# Altium PCB BuckTest.PcbDoc
Units mil, origin at the board's own origin, x right, y up, seen from the top; angles counter-clockwise.
Board outline 2275 x 2100 mil, 2 copper layers (Top Layer, Bottom Layer); 27 components, 21 nets, 91 pads, 13 vias.
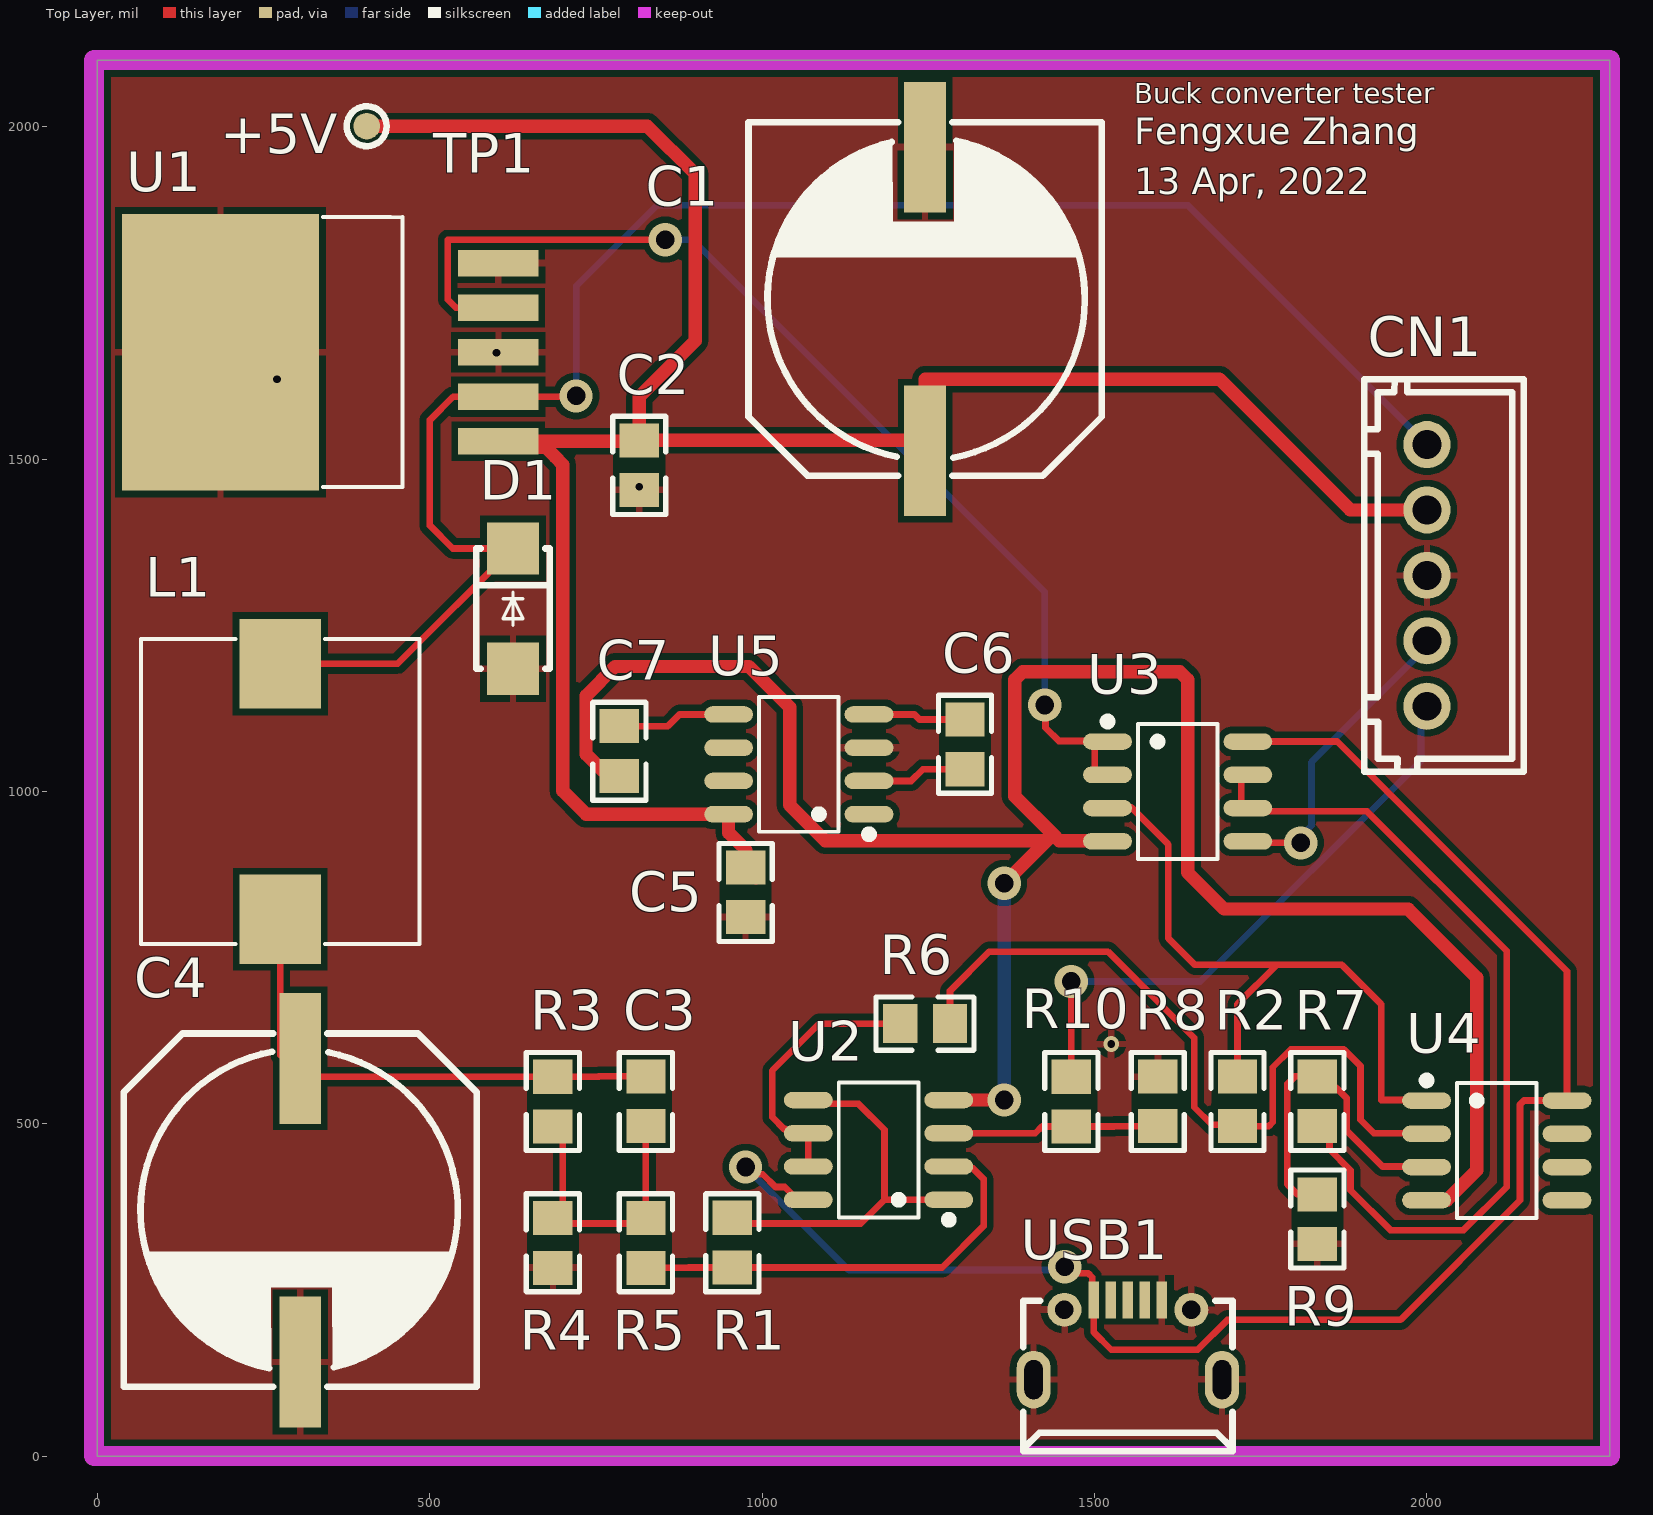
[diagram p0: Top Layer view]
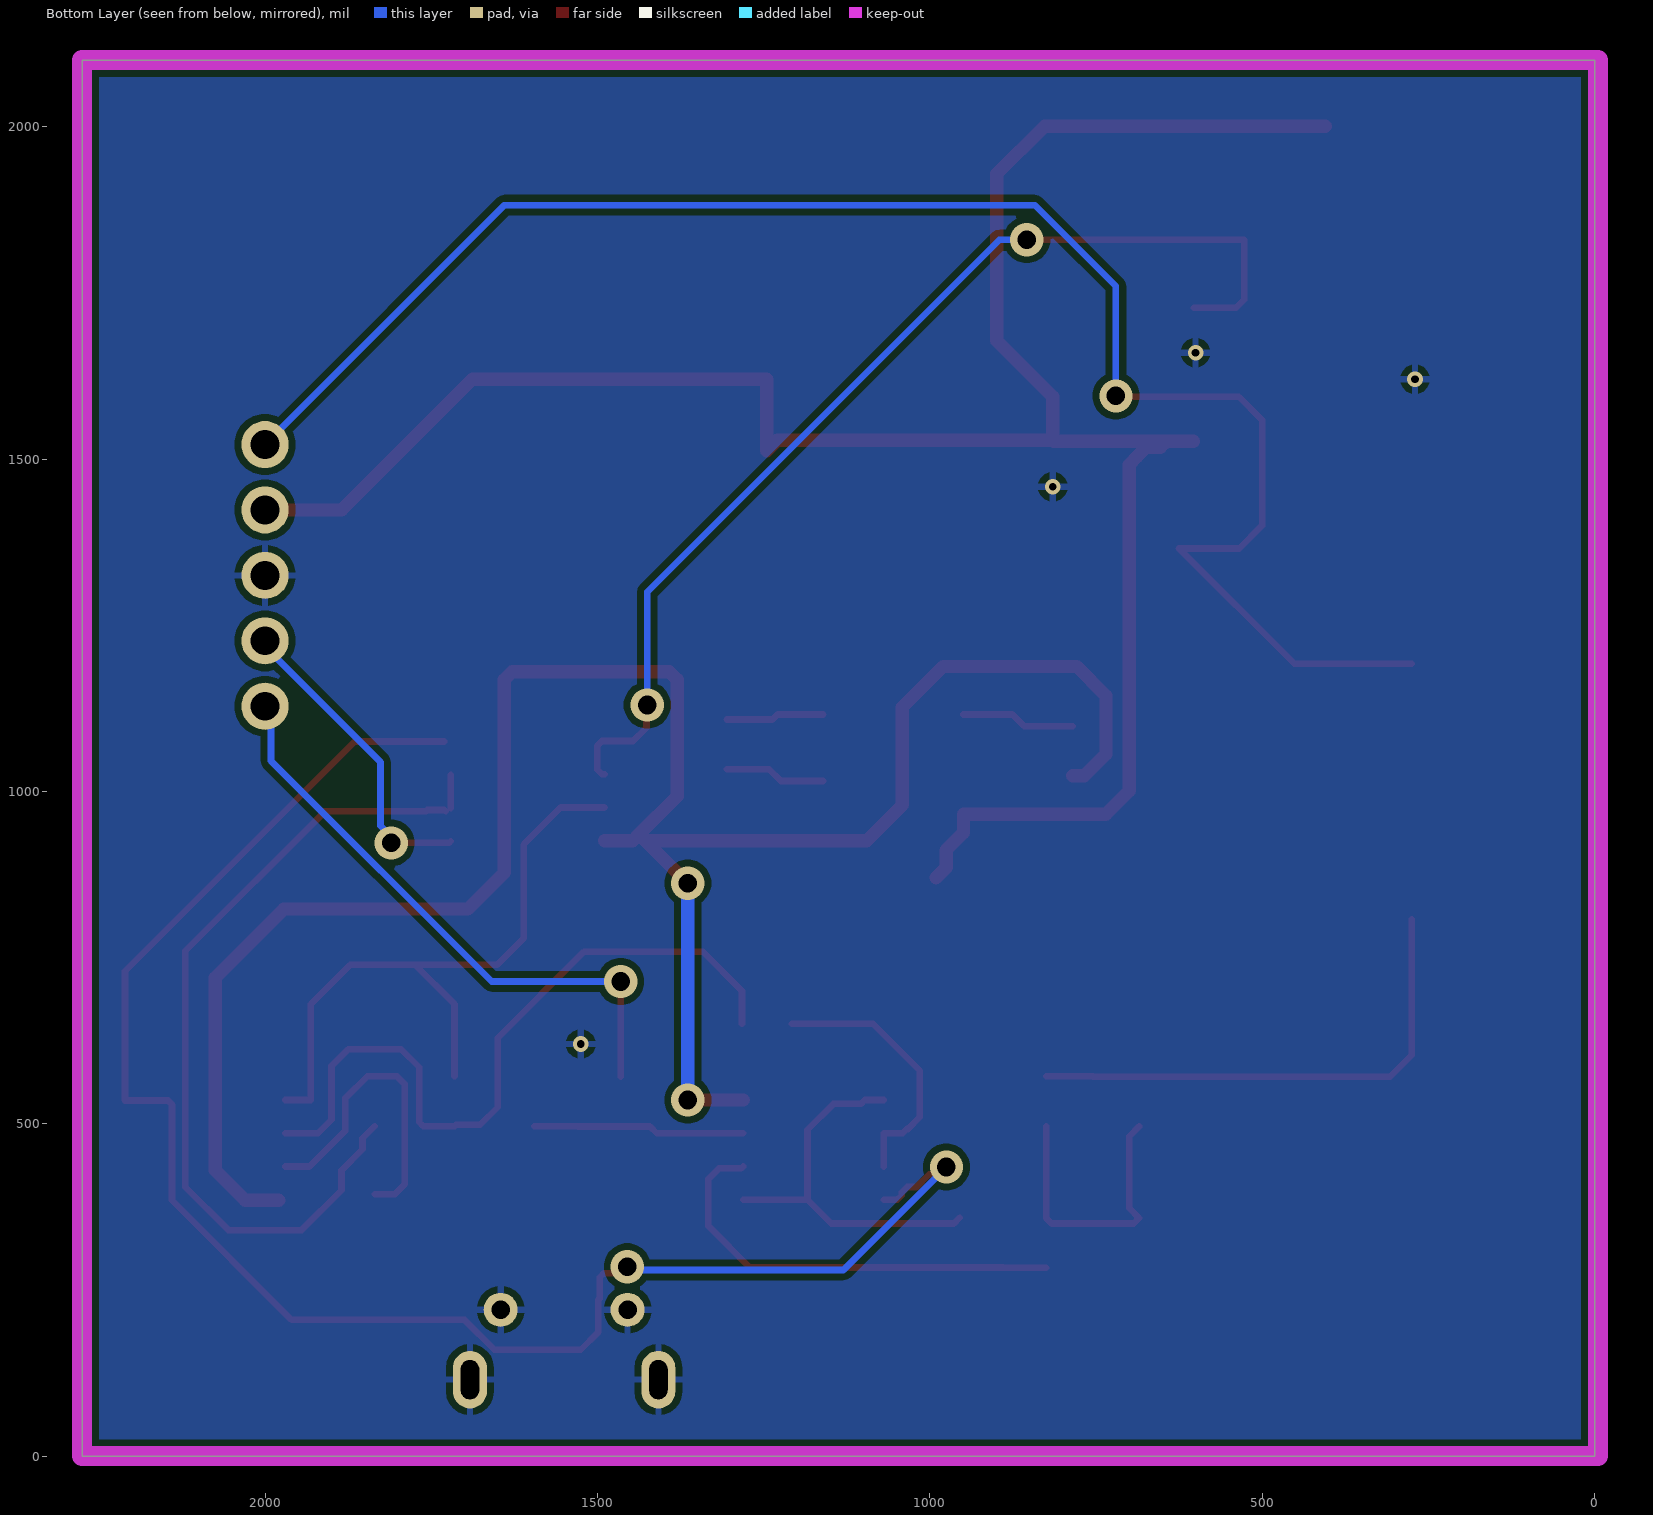
[diagram p1: Bottom Layer view, seen from below]
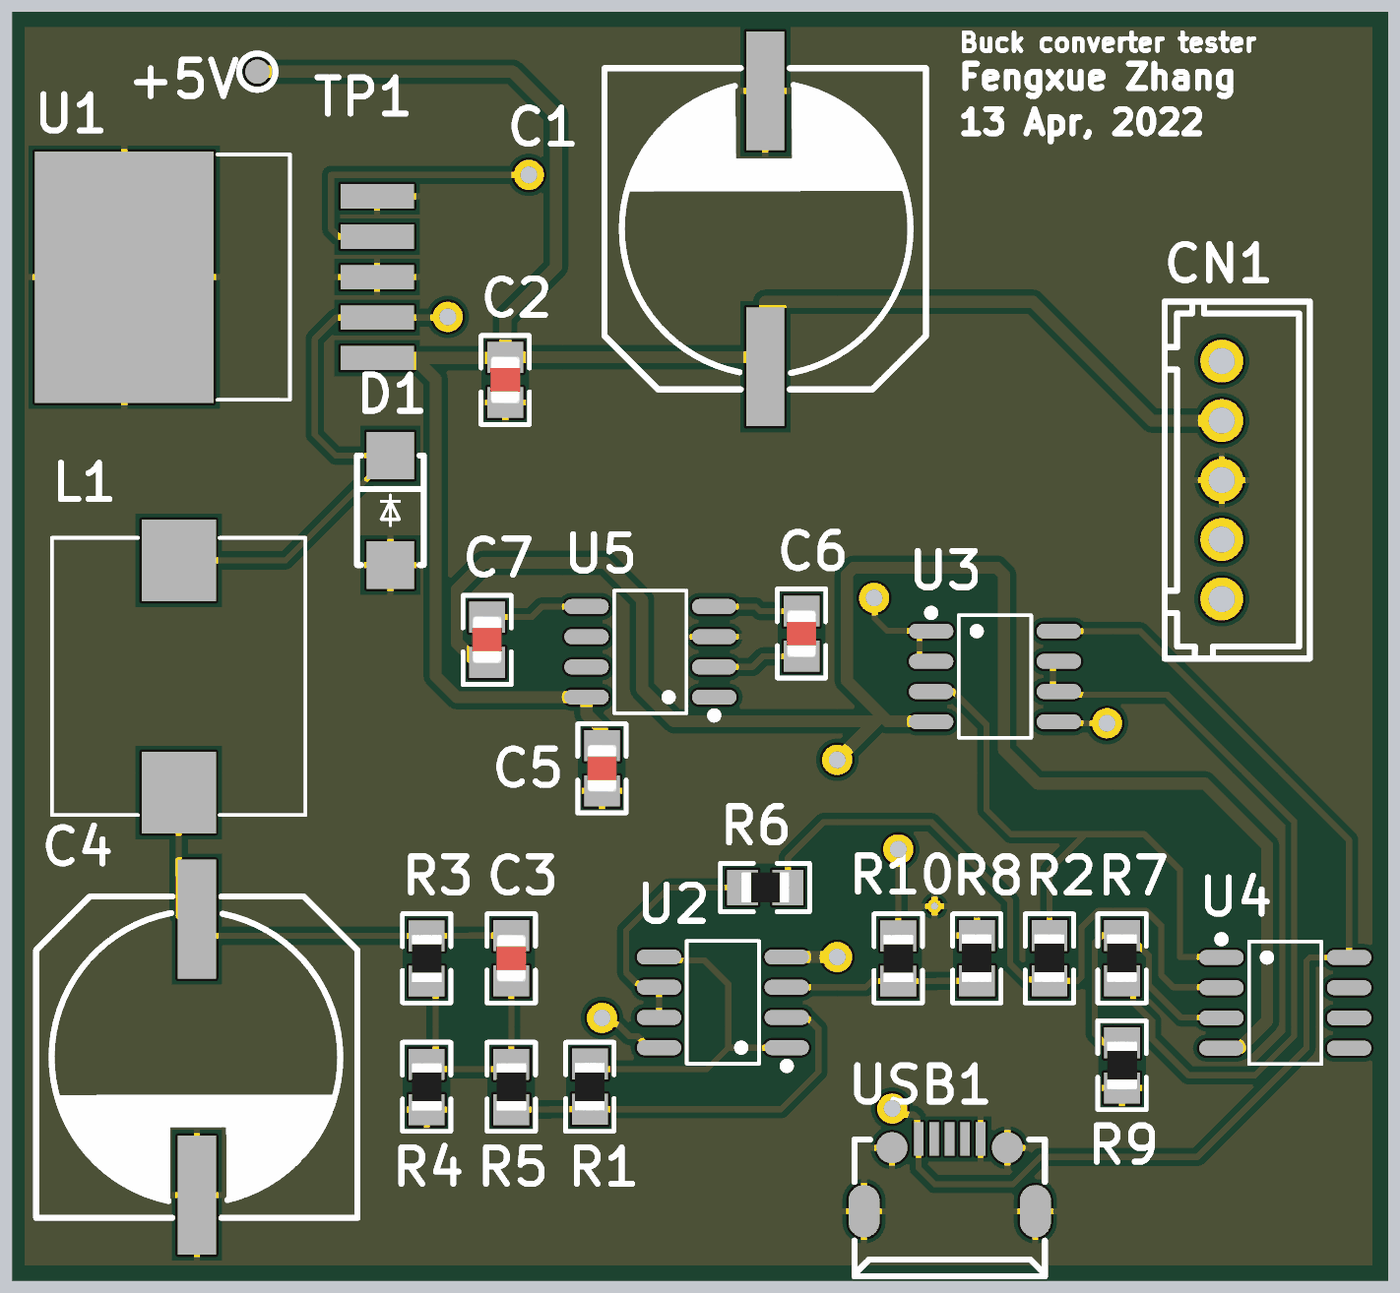
[diagram p2: 3D render of the assembled board from above, using the file's embedded part models]

## Layer stack, top to bottom
Top Solder: solder mask 0.4, Solder Resist, Dk 3.5
Top Layer: signal copper 1.4
Dielectric 1: dielectric 12.6, FR-4, Dk 4.8
Bottom Layer: signal copper 1.4
Bottom Solder: solder mask 0.4, Solder Resist, Dk 3.5

## Board outline
0,0 0,25 0,2100 2275,2100 2275,0

## Design rules (kind name [scope] priority, off if disabled: settings)
Clearance [All] p1: gap=10 ignorepadtopadclearanceinfootprint=FALSE
HoleSize [All] p1: absolutevalues=TRUE maxlimit=40 minlimit=22 maxpercent=80.000 minpercent=20.000
MinimumSolderMaskSliver [All] p1: minsoldermaskwidth=1
PolygonConnect [All] p1: connectstyle=Relief reliefconductorwidth=10 reliefentries=4 polygonreliefangle="90 Angle" airgapwidth=10
RoutingVias [All] p1: holewidth=28 width=50 viastyle="Through Hole" minholewidth=28 minwidth=50 maxholewidth=28 maxwidth=50
SilkToSolderMaskClearance [IsPad] p1: minsilkscreentomaskgap=1 clearancetoexposedcopper=TRUE
SolderMaskExpansion [All] p1: expansion=4 istentingtop=FALSE
UnConnectedPin [All] p1:
Width VBUS [InNet('VBUS')] p1: maxlimit=20 minlimit=10 preferedwidth=20
Width -5v [InNet('-5V')] p2: maxlimit=20 minlimit=10 preferedwidth=20
Width [All] p3: maxlimit=10 minlimit=10 preferedwidth=10
27 further rules are at their usual default settings.

## Components (designator, comment, footprint, x,y, rotation, side; value= is the part's Value field where it differs from the comment)
C1 "470uF" CAP-SMD_BD12.5-L13.0-W13.0-RD 1245,1740.77 r270 top (schematic designator C3)
C2 "0.1uF" 0805C 815,1490.77 r270 top (schematic designator C5)
C3 "0.1uF" 0805C 825,533.87 r270 top (schematic designator C6)
C4 "470uF" CAP-SMD_BD12.5-L13.0-W13.0-RD 305,370 r90 top (schematic designator C7)
C5 "10uF" 0805C 975,848.17 r270 top (schematic designator C1)
C6 "10uF" 0805C 1305,1070.77 r90 top (schematic designator C2)
C7 "10uF" 0805C 785,1060.77 r270 top (schematic designator C4)
CN1 "HX25003-5A" CONN-TH_5P-P2.50_HX25003-5A 2000,1325 r90 top
D1 "SS34_C8678" DO-214AC_L4.3-W2.7-LS5.3-RD 625,1275 r270 top
L1 "15uH" IND-SMD_L11.5-W10.5_MWSA1004 275,1000 r90 top
R1 "1K" 0805 955,321.27 r270 top (schematic designator R2)
R2 "2k" 0805 1715,533.87 r270 top (schematic designator R3)
R3 "12k" 0805 685,533.37 r90 top (schematic designator R1)
R4 "2k" 0805 685,320.77 r90 top
R5 "1K" 0805 825,320.77 r90 top
R6 "2k" 0805 1245,650.77 r180 top
R7 "5.1K" 0805 1835,533.87 r270 top
R8 "5.1K" 0805 1595,533.87 r270 top
R9 "5.1K" 0805 1835,356.47 r90 top
R10 "5.1K" 0805 1465,533.37 r90 top
TP1 "INPUT" Testpoin 405,2000.77 r0 top value=Input
U1 "LM2596S-ADJ" TO-263-5_L10.2-W8.9-P1.70-BR 394.05,1660.77 r0 top (schematic designator U2)
U2 "LMV358-SR" SOP-8_L4.9-W3.9-P1.27-LS6.0-BL 1175,460.77 r90 top (schematic designator U3)
U3 "LMV358-SR" SOP-8_L4.9-W3.9-P1.27-LS6.0-BL 1625,1000 r270 top (schematic designator U4)
U4 "LMV358-SR" SOP-8_L4.9-W3.9-P1.27-LS6.0-BL 2105,460 r270 top (schematic designator U5)
U5 "ICL7660M/TR" SOP-8_L4.9-W3.9-P1.27-LS6.0-BL 1055,1040.77 r90 top (schematic designator U1)
USB1 "microUSB" MICRO-USB-SMD_MICROXNJ 1550,175 r0 top

## Footprints (in the part's own frame and the unit in brackets; to place one, negate y for a bottom-side part, rotate by r counter-clockwise, add the part's x,y. Pads: shape width x height; smd on the part's side, far side on the other; paste and mask are expansions set on the pad)
0805 [mm]
  rect 1.3x1.5 smd: 1(-0.95,0) 2(0.95,0)
  silkscreen extent -1.87,-1.02 1.88,1.02, body extent -1,-0.63 1,0.62, height 0.5
0805C [mm]
  rect 1.3x1.5 smd: 1(-0.95,0) 2(0.95,0)
  silkscreen extent -1.87,-1.02 1.88,1.02, body extent -1,-0.62 1,0.63, height 0.78
CAP-SMD_BD12.5-L13.0-W13.0-RD [mm]
  rect 5x1.6 smd: 1(5.8,0) 2(-5.8,0)
  silkscreen extent -6.75,-6.75 6.75,6.75
CONN-TH_5P-P2.50_HX25003-5A [mm]
  round 1.8 hole 1.1: 1(-5,0) 2(-2.5,0) 3(0,0) 4(2.5,0) 5(5,0)
  silkscreen extent -7.5,-3.7 7.5,2.4
DO-214AC_L4.3-W2.7-LS5.3-RD [mm]
  rect 2x2 smd: 1(-2.3,0) 2(2.3,0)
  silkscreen extent -2.3,-1.4 2.3,1.4
IND-SMD_L11.5-W10.5_MWSA1004 [mm]
  rect 3.424x3.12 smd: 1(4.878,0) 2(-4.878,0)
  silkscreen extent -5.83,-5.33 5.83,5.33
MICRO-USB-SMD_MICROXNJ [mm]
  rect 0.4x1.4 smd: 1(-1.3,1.521) 2(-0.65,1.521) 3(0,1.521) 4(0.65,1.521) 5(1.3,1.521)
  round 1.3 hole 0.7: 6(2.425,1.149) 9(-2.425,1.149)
  oval 1.3x2.2 hole 0.7 slot 1.5 at 90 deg: 7(3.6,-1.521) 8(-3.6,-1.521)
  silkscreen extent -4,-4.26 4,1.49
SOP-8_L4.9-W3.9-P1.27-LS6.0-BL [mm]
  oval 0.63x1.865 smd: 1(-1.905,-2.682) 2(-0.635,-2.682) 3(0.635,-2.682) 4(1.905,-2.682) 5(1.905,2.682) 6(0.635,2.682) 7(-0.635,2.682) 8(-1.905,2.682)
  silkscreen extent -2.82,-2.83 2.58,1.52
Testpoin [mil] "Testpoint"
  round 40 smd: 1(0,0)
  silkscreen extent -30,-30 30,30
TO-263-5_L10.2-W8.9-P1.70-BR [mm]
  rect 3.083x1.02 smd: 1(5.31,-3.4) 2(5.31,-1.7) 3(5.31,0) 4(5.31,1.7) 5(5.31,3.4)
  rect 7.521x10.566 smd: 6(-5.31,0)
  silkscreen extent -1.4,-5.16 1.65,5.16

## Part data
C1 C4: BOM_JLCPCB Part Class="Extended Part", BOM_Manufacturer=ROQANG, BOM_Manufacturer Part=RVT1H471M1213, BOM_Supplier=LCSC, BOM_Supplier Part=C90272, nameAlias=Capacitance, spicePre=C, spiceSymbolName=RVT1H471M1213
C2 C3: library part C_0.1uf, "Capacitor", Reviewed by="RM - 2018/08/05", Revision="July-2002: Re-released for DXP Platform."
C5 C6 C7: library part C_10uf, "Capacitor", Reviewed by="RM - 2018/08/05", Revision="July-2002: Re-released for DXP Platform."
CN1: BOM_JLCPCB Part Class="Extended Part", BOM_Manufacturer="HX(Zhejiang Yueqing Hongxing Elec)", BOM_Manufacturer Part=HX25003-5A, BOM_Supplier=LCSC, BOM_Supplier Part=C442302, Contributor=LCSC, spicePre=C, spiceSymbolName=HX25003-5A
D1: BOM_JLCPCB Part Class="Basic Part", BOM_Manufacturer=MDD, BOM_Manufacturer Part=SS34, BOM_Supplier=LCSC, BOM_Supplier Part=C8678, spicePre=D, spiceSymbolName=SS34_C8678
L1: BOM_JLCPCB Part Class="Extended Part", BOM_Manufacturer=Sunlord, BOM_Manufacturer Part=MWSA1004-150MT, BOM_Supplier=LCSC, BOM_Supplier Part=C151872, Contributor=LCSC, nameAlias=Inductance, spicePre=L, spiceSymbolName=MWSA1004-150MT
R1 R5: library part R_1k, "Resistor", Reviewed by="RM - 2018/08/05"
R2 R4 R6: library part R_2k, "Resistor", Reviewed by="RM - 2018/08/05"
R3: library part R_12k, "Resistor", Reviewed by="RM - 2018/08/05"
R7 R8 R9 R10: library part R_5.1k, "Resistor", Reviewed by="RM - 2018/08/05"
TP1: library part "Test Point", "Pad"
U1: BOM_JLCPCB Part Class="Extended Part", BOM_Manufacturer="UMW(Youtai Semiconductor Co., Ltd.)", BOM_Manufacturer Part=LM2596S-ADJ, BOM_Supplier=LCSC, BOM_Supplier Part=C347423, Contributor=LCSC, spicePre=U, spiceSymbolName=LM2596S-ADJ
U2 U3 U4: BOM_JLCPCB Part Class="Extended Part", BOM_Manufacturer=Gainsil, BOM_Manufacturer Part=LMV358-SR, BOM_Supplier=LCSC, BOM_Supplier Part=C362274, spicePre=U, spiceSymbolName=LMV358-SR, subpart_no=2
U5: BOM_JLCPCB Part Class="Extended Part", BOM_Manufacturer=HGSEMI, BOM_Manufacturer Part=ICL7660M/TR, BOM_Supplier=LCSC, BOM_Supplier Part=C356724, Contributor=LCSC, spicePre=U, spiceSymbolName=ICL7660M/TR
USB1: library part MICROXNJ, BOM_JLCPCB Part Class="Extended Part", BOM_Manufacturer="SHOU HAN", BOM_Manufacturer Part=MicroXNJ, BOM_Supplier=LCSC, BOM_Supplier Part=C404969, Contributor=LCSC, spicePre=U, spiceSymbolName=MICROXNJ

## Via types
v1: diameter 50, hole 28, Top Layer to Bottom Layer, 9 vias
v2: diameter 23.62, hole 11.81, Top Layer to Bottom Layer, 4 vias

## Nets (pads, with @x,y where several pads share a name; then routed paths per layer and width w, separated by ;. In a path a pad name is that pad's centre, name@x,y a point inside that pad or via, vN(x,y) a via of type N, cw(c..) or ccw(c..) an arc to the next point about the centre after c; other vN are vias at no path point)
+5: U2.8 U3.8 U4.8 USB1.1 | length 2575.3
  Top Layer w10: v1(975,435) 985.82,435 996.61,424.22 1000.78,424.22 1020,405 1033.84,405 1042.25,396.59 1042.25,392.61 1049.08,385.77 U2.8 ; v1(1455,285) 1465.82,285 1475.82,275 1490.56,275 1496.42,269.14 1496.42,237.29 USB1.1 1498.82,186.18 1525,160 1655,160 1700,205 1960,205 2140,385 2140,529.14 2145.86,535 U4.8 2210.61,729.39 1865,1075 U3.8
  Bottom Layer w10: v1(975,435) 1130,280 1450,280 v1(1455,285)
-5V: C7.2 U2.4 U3.4 U4.4 | length 3348.3
  Top Layer w20: C7.2 767.4,1023.37 735,1055.77 735,1144 779,1188 980,1188 1041.23,1126.77 1041.23,979.54 1095,925.77 1427.77,925.77 ; U2.4 v1(1364,535.77) ; v1(1364,862) 1427.77,925.77 ; U3.4@1489.39,925.77 1447,925.77 1437.39,935.39 ; U4.4@1979.39,385 2030,385 2075,430 2075,720 1972,823 1695,823 1640,878 1640,1168.28 1628.28,1180 1391.72,1180 1380,1168.28 1380,992.77 1437.39,935.39 ; 1427.77,925.77 1437.39,935.39
  Bottom Layer w20: v1(1364,535.77) v1(1364,862)
AGND: C1.2 C2.2 C4.2 C5.2 CN1.3 D1.2 R4.1 R8.1 R9.1 U1.3 U1.5 U1.6 U5.3 USB1.5 USB1.6 USB1.7 USB1.8 USB1.9
  other v2: 1525,620 815,1458.37 270,1620 600,1660
Feedback: U1.4 U3.1 U3.2 | length 1628.1
  Top Layer w10: U1.4 539.3,1727.7 527,1740 527,1830 v1(854,1830) ; v1(1425,1130) 1426.14,1128.86 1426.14,1095.86 1446.23,1075.77 1493.16,1075.77 1500,1068.93 1500,1032.61 1493.16,1025.77 U3.2@1489.39,1025.77
  Bottom Layer w10: v1(854,1830) 895,1830 1425,1300 v1(1425,1130)
NetC3_1: C3.1 C4.1 L1.2 R3.2 | length 768.3
  Top Layer w10: L1.2 275,603.35 307.57,570.77 R3.2 754,570.77 754.5,571.27 C3.1
NetC3_2: C3.2 R3.1 R4.2 R5.2 | length 435.3
  Top Layer w10: R3.1 700,480.97 700,373.17 R4.2 693.17,350 816.83,350 R5.2 C3.2
NetC6_1: C6.1 U5.2 | length 151.7
  Top Layer w10: U5.2 1224,1015.77 1241.6,1033.37 C6.1
NetC6_2: C6.2 U5.4 | length 147.5
  Top Layer w10: U5.4 1229,1115.77 1236.6,1108.17 C6.2
NetC7_1: C7.1 U5.5 | length 171.7
  Top Layer w10: C7.1 858,1098.17 875.6,1115.77 U5.5
NetR1_1: R1.1 U2.1 U2.5 | length 582.4
  Top Layer w10: R1.1 963.67,350 1148.23,350 1184,385.77 ; U2.5 1097.71,535.77 1103.48,530 1145,530 1184,491 1184,385.77 ; U2.1 1184,385.77
NetR1_2: R1.2 R5.1 U2.2 | length 665.1
  Top Layer w10: R5.1 889,283.37 889.5,283.87 R1.2 1270.87,283.87 1333,346 1333,417 1317.06,432.94 1283.44,432.94 U2.2
NetR2_1: R2.1 U3.3 U4.1 | length 1021.5
  Top Layer w10: U3.3@1489.39,975.77 1555.23,975.77 1611,920 1611,779 1651,739 1774,739 ; R2.1 1715,680 1774,739 ; U4.1@1969.39,535.77 1931,535.77 1931,680 1872,739 1774,739
NetR2_2: R2.2 R6.1 U4.2 | length 1122.4
  Top Layer w10: R6.1 1282.4,700 1341.4,759 1520,759 1650,629 1650,525 1676.33,498.67 1712.8,498.67 R2.2 ; R2.2@1718.94,496.47 1762.14,496.47 1768,502.33 1768,585 1795,612 1875,612 1900,587 1900,506 1920.23,485.77 U4.2@1969.39,485.77
NetR6_2: R6.2 U2.6 U2.7 | length 406.3
  Top Layer w10: U2.7 U2.6 1041.07,485.77 1034.62,492.22 1032.78,492.22 1015,510 1015,580 1085.77,650.77 R6.2
NetR7_1: R7.1 R9.2 U4.3 | length 471.1
  Top Layer w10: R9.2 1805,393.87 1790,408.87 1790,560 1801.27,571.27 R7.1 1846.26,571.27 1879.53,538 1879.53,489.24 1933,435.77 U4.3@1969.39,435.77
NetR7_2: R7.2 U3.6 U3.7 | length 1289.5
  Top Layer w10: U3.6@1720.61,975 U3.7@1720.61,1025 ; U3.6@1728.19,970 1730.36,972.17 1756.01,972.17 1758.18,970 1910,970 2120,760 2120,405 2055,340 1945,340 1885,400 1885,430 1853.26,461.74 1853.26,478.2 R7.2
NetR8_2: R8.2 R10.1 U2.3 | length 318.8
  Top Layer w10: U2.3 1410.77,485.77 1420.97,495.97 1529,495.97 1529.5,496.47 R8.2
Output: CN1.5 D1.1 L1.1 U1.2 | length 2599.7
  Top Layer w10: L1.1 451.5,1192.05 D1.1 534.45,1365.55 500,1400 500,1558.84 535,1593.84 718.84,1593.84 v1(720,1595)
  Bottom Layer w10: v1(720,1595) 720,1760 842,1882 1639.85,1882 CN1.5
VBUS: C1.1 C2.1 C5.1 CN1.4 TP1.1 U1.1 U5.8 | length 3489
  Top Layer w20: TP1.1 827.23,2000.77 899,1929 899,1678 815,1594 C2.1 1229.25,1528.17 C1.1 1245,1620 1688,1620 1884.57,1423.43 CN1.4 ; U1.1 C2.1@813.74,1526.91 ; U1.1@643.71,1526.91 653.17,1517.45 674.08,1517.45 688.28,1503.25 700,1491.54 700,1000.77 735,965.77 U5.8 949.39,937.61 975,912 C5.1 C5.1@990.59,869.98
Vcom_buck: CN1.2 U3.5 | length 473.1
  Top Layer w10: U3.5@1720.61,925 1723,922.61 v1(1810.16,922.61)
  Bottom Layer w10: v1(1810.16,922.61) 1810.16,932.35 1826.28,948.47 1826.28,1044.14 2000,1217.86 CN1.2
Vref_buck: CN1.1 R10.2 | length 892.6
  Top Layer w10: R10.2 v1(1465,714)
  Bottom Layer w10: v1(1465,714) 1659,714 1990.91,1045.91 1990.91,1119.06 CN1.1
pads on no net: U4.5 U4.6 U4.7 U5.1 U5.6 U5.7 USB1.2 USB1.3 USB1.4

## Polygon pours and split planes (outlines as drawn)
AGND on Top Layer "AGND_L01_P000" (solid, remove dead copper, pour order 0): 0,2100 0,0 2275,0 2275,2100
AGND on Bottom Layer "AGND_L02_P002" (solid, remove dead copper, pour order 2): 0,2100 0,25 2250,25 2275,0 2275,2100

## Keep-outs
Keep-Out Layer:
  lines w30: -5,0 2275,0 2275,2100 -5,2100 -5,0

## Silkscreen, mask and mechanical layers (free items; w line width, h text height)
Top Overlay:
  text "Buck converter tester" at 1560,2035 h30
  text "Fengxue Zhang" at 1560,1973.33 h40
  text "+5V" at 185,1960 h60
  text "13 Apr, 2022" at 1560,1898.33 h40
Mechanical 1:
  lines w10: 0,0 0,2100 2275,2100 2275,0 0,0